# EAGLE board pot-boardDesp-snak2 (EAGLE 6.6.0)
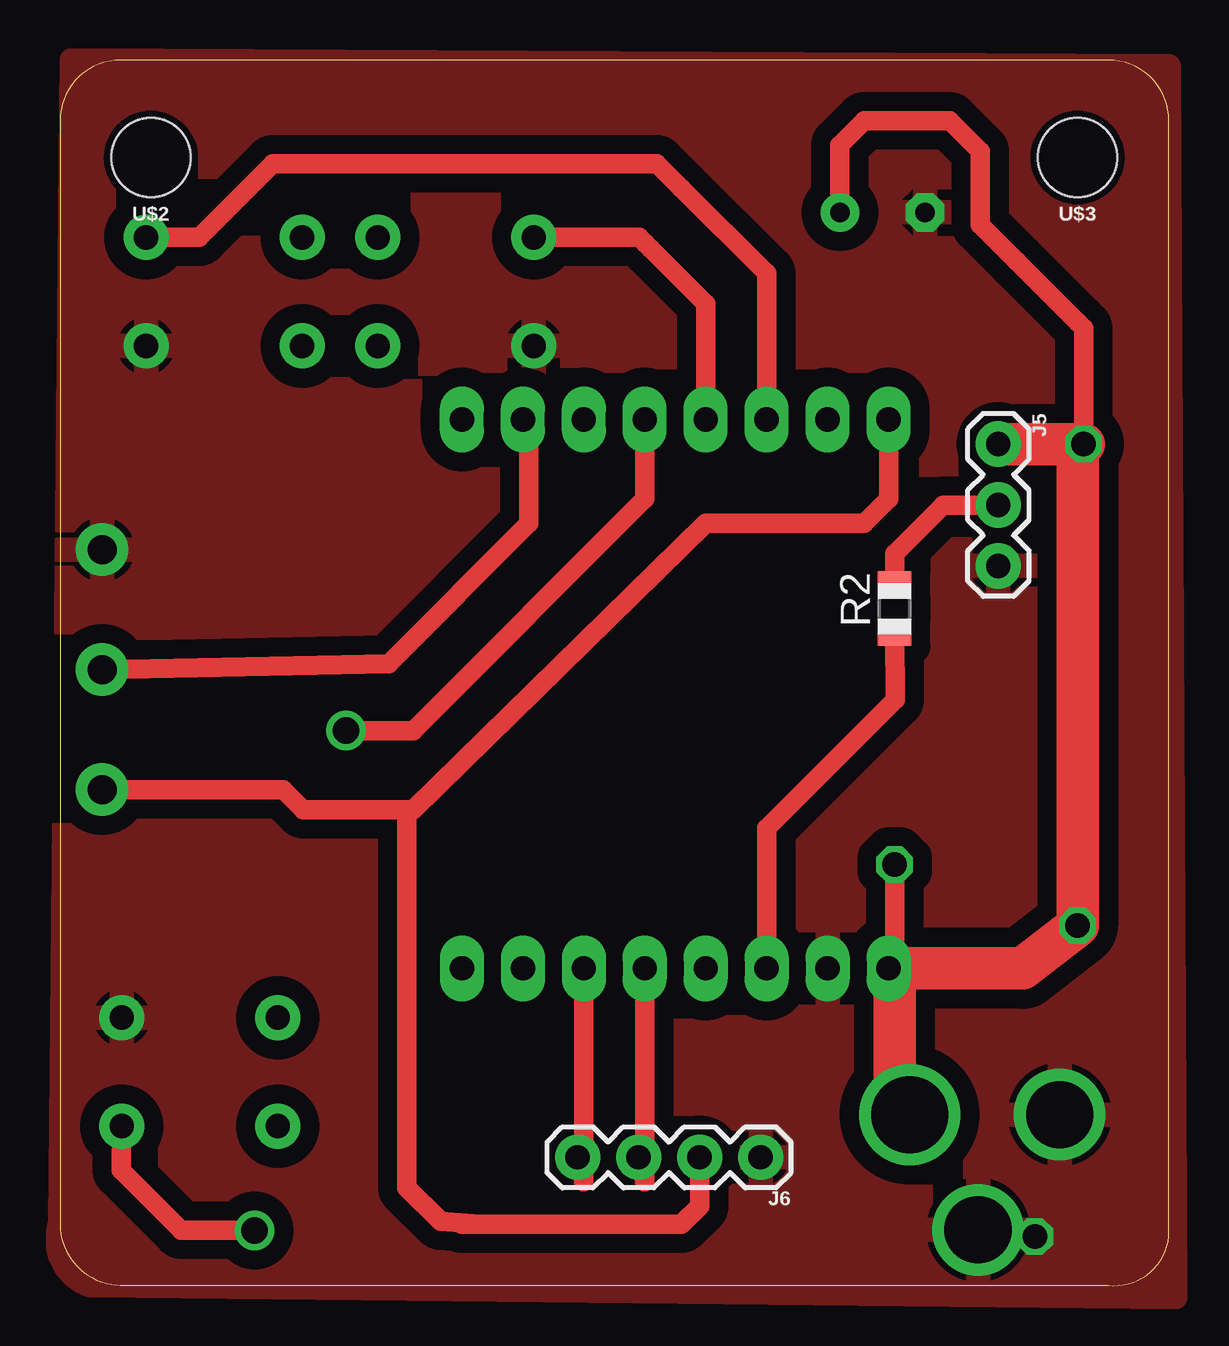
[diagram p0: board, top side]
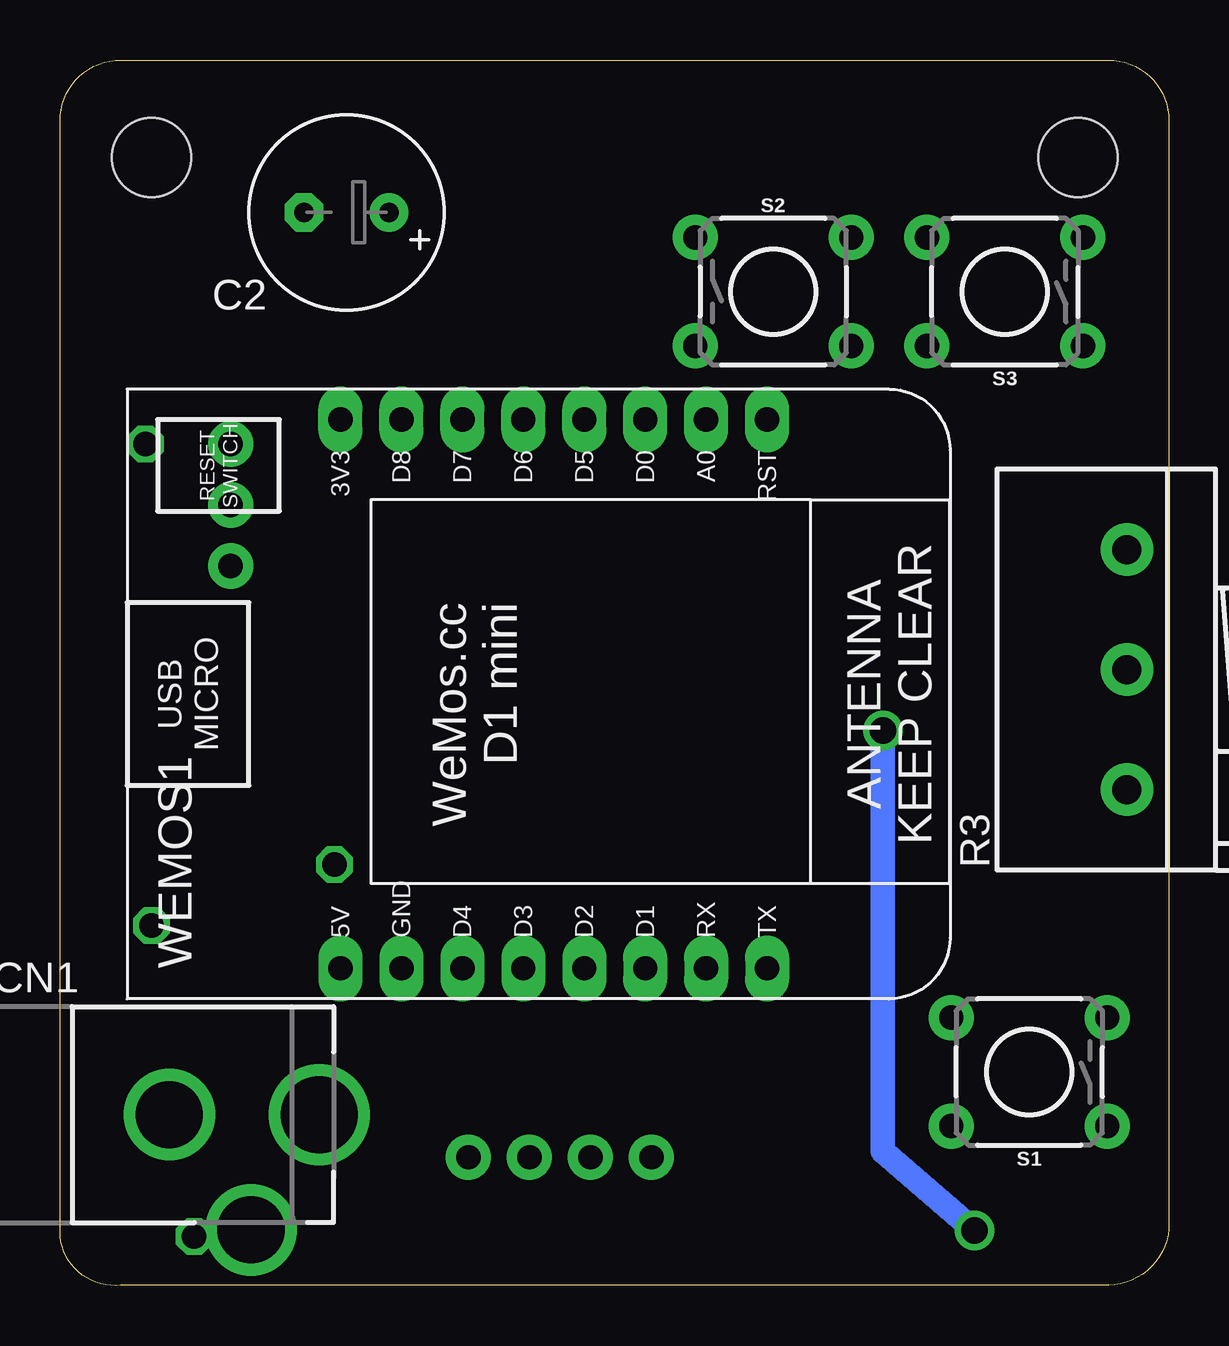
[diagram p1: board, bottom side, seen from below]

Size 46.21 x 51.07 mm. Coordinates in mm from the lower left corner, seen from the top.
Outline: 46.21,2.05 46.21,48.53 arc90 43.67,51.07 2.54,51.07 arc90 0,48.53 0,2.63 arc90 2.52,0.01 43.67,0.01 arc90 46.21,2.05
Copper layers (1*16): Top 0.035mm / dielectric 1.5mm / Bottom 0.035mm
Design rules "OthermillDRC_1_32_v2": minimum track width 8mil, minimum drill 0.8mm, track to track 0.794003125mm, track to pad 0.794003125mm, pad to pad 0.794003125mm, via to via 0.794003125mm, smd to smd 0mil, copper to edge 0mil, drill to drill 1mil, minimum pad ring 10mil, minimum via ring 10mil, stop-mask expansion 1mil, vias tented up to drill 30mil, thermal gap 10mil

## Footprints (pad centres in the part's own frame; a part is rotated, then mirrored left to right if it is on the bottom)
E3,5-8 = drill 0.813 pad 1.6: + -1.778,0 | drill 0.813 pad 1.6 octagon: - 1.778,0
DCJACK_2MM_PTH = drill 2.8: GND 0,7.35; GNDBREAK 4.8,10.75 | drill 3.2: PWR 0,13.6
1X03 = drill 1.016 pad 1.88: 1 0,0; 2 2.54,0; 3 5.08,0
1X04 = drill 1.016 pad 1.88: 1 0,0; 2 2.54,0; 3 5.08,0; 4 7.62,0
R0805 = smd 1.1 x 1.4: 1 -1,0; 2 1,0
3RP/1610N = drill 1.2 pad 2.184: 1 -5,0; 2 0,0; 3 5,0
TACTILE_SWITCH_PTH_6.0MM = drill 1.016 pad 1.88: 1 -3.251,2.261; 2 3.251,2.261; 3 -3.251,-2.261; 4 3.251,-2.261
STAND-OFF = hole 3.302: 0,0
WEMOS-D1-MINI = drill 1.016 pad 1.829 long: 3V3 -10.16,-10.16; 5V 12.7,-10.16; A0 -10.16,5.08; D0 -10.16,2.54; D1 12.7,2.54; D2 12.7,0; D3 12.7,-2.54; D4 12.7,-5.08; D5 -10.16,0; D6 -10.16,-2.54; D7 -10.16,-5.08; D8 -10.16,-7.62; GND 12.7,-7.62; RESET -10.16,7.62; RX 12.7,5.08; TX 12.7,7.62

## Placement (x,y rotation side)
C2  [E3,5-8]  34.27,44.72 180 bottom
CN1  [DCJACK_2MM_PTH]  49,7.13 270 bottom
J5  [1X03]  39.1,35.07 270 top
J6  [1X04]  29.19,5.35 180 top
R2  500  [R0805]  34.78,28.21 90 top
R3  [3RP/1610N]  1.76,25.67 90 bottom
S1  tact6mm  [TACTILE_SWITCH_PTH_6.0MM]  5.82,8.9 180 bottom
S2  tact6mm  [TACTILE_SWITCH_PTH_6.0MM]  16.49,41.42 0 bottom
S3  tact6mm  [TACTILE_SWITCH_PTH_6.0MM]  6.84,41.42 180 bottom
U$2  [STAND-OFF]  3.79,47 180 top
U$3  [STAND-OFF]  42.4,47 180 top
WEMOS1  [WEMOS-D1-MINI]  24.36,25.92 270 bottom

## Library data of the parts
C2 CN1 R2 = adafruit
J5 = SparkFun-Connectors
J6 = SparkFun-Connectors; PROD_ID: CONN-09696
R3 = pot
S1-S3 = SparkFun-Switches; PROD_ID: SWCH-08441; SF_SKU: COM-00097
U$2 U$3 = SparkFun-Hardware
WEMOS1 = esp8266modules

## Nets
+3V3: J6.2 R3.1 WEMOS1.3V3
A0: R3.2 WEMOS1.A0
BUTT1: S1.1 WEMOS1.D5
BUTT2: S2.1 WEMOS1.D6
BUTT3: S3.3 WEMOS1.D7
GND: C2.- CN1.GND CN1.GNDBREAK J5.3 J6.1 R3.3 S1.3 S2.3 S3.1 WEMOS1.GND
LED1: R2.1 WEMOS1.D4
LED1O: J5.2 R2.2
LED2: WEMOS1.D3
SCL: J6.4 WEMOS1.D1
SDA: J6.3 WEMOS1.D2
VIN: C2.+ CN1.PWR J5.1 WEMOS1.5V

## Tracks (layer width: path | path; a pad name or v marks a point on that pad's centre or on a via)
+3V3
  Top 0.813: 2.52,20.67 R3.1 3.71,20.67 8.03,20.67 9.3,20.67 10.14,19.83 11.16,19.83 14.46,19.83 | J6.2 26.65,3.32 25.89,2.55 17.51,2.55 | 17.51,2.55 16.74,2.55 17.51,2.55 | WEMOS1.3V3 34.52,32.78 33.51,31.76 27.92,31.76 26.9,31.76 14.71,19.83 14.46,19.83 | 17.51,2.55 15.86,2.68 14.46,4.08 14.46,14.24 14.46,19.83
A0
  Top 0.813: R3.2 13.7,25.92 19.54,31.76 19.54,35.83 WEMOS1.A0
BUTT1  (via drill 1.1)
  Top 0.813: v11.92,23.13 14.71,23.13 24.36,32.78 WEMOS1.D5 | S1.1 2.54,4.81 5.06,2.3 v8.11,2.3
  Bottom 1.016: v8.11,2.3 11.92,5.6 v11.92,23.13
BUTT2
  Top 0.813: WEMOS1.D6 26.9,40.91 24.62,43.19 24.39,43.42 24.14,43.68 S2.1
BUTT3
  Top 0.813: WEMOS1.D7 29.44,42.18 25.89,45.73 24.87,46.75 23.6,46.75 9.2,46.75 | 9.2,46.75 8.87,46.75 | 8.87,46.75 9.2,46.75 | S3.3 5.04,43.68 5.8,43.68 8.87,46.75
GND  (via drill 1.02)
  other vias: 40.62,2.05
  pour Top: 0.49,51.07 0.01,2.58 arc91 1.28,0.01 46.46,-0.49 46.21,50.81
LED1
  Top 0.813: WEMOS1.D4 29.44,16.27 29.44,19.06 34.79,24.41 R2.1
LED1O
  Top 0.813: J5.2 36.81,32.53 34.78,30.49 R2.2
SCL
  Top 0.813: WEMOS1.D1 21.82,4.33 J6.4
SDA
  Top 0.813: WEMOS1.D2 24.36,4.33 J6.3
VIN  (via drill 1.02)
  Top 0.813: 34.78,13.22 v34.78,17.54 34.78,13.22 | 34.78,13.22 34.78,12.97 | 34.78,12.97 34.78,7.38 | 34.78,7.38 CN1.PWR | CN1.PWR 35.54,7.13 | WEMOS1.5V 34.78,12.97 | 34.78,12.97 34.78,7.38 | 34.78,7.38 CN1.PWR | CN1.PWR 35.54,7.13 | 35.54,7.13 CN1.PWR | CN1.PWR 34.78,7.38 | 34.78,7.38 34.78,12.97 | 34.78,12.97 34.78,13.22 | C2.+ 32.49,47.51 33.51,48.53 37.06,48.53 38.33,47.26 38.33,44.21 39.86,42.69 42.4,40.15 42.65,39.89 v42.65,35.07
  Top 1.016: 42.4,35.07 v42.65,35.07
  Top 1.27: v42.4,15 40.11,13.22
  Top 1.778: 34.78,7.38 34.78,13.22 40.11,13.22 v42.4,15 42.4,35.07 | CN1.PWR 34.78,7.38 | 35.54,7.13 34.78,7.38 | J5.1 42.4,35.07 | 42.4,35.07 v42.65,35.07 | 42.4,35.07 v42.65,35.07 | v42.65,35.07 42.4,35.07

## Text on the board
tPlace: ILOVELAMP | pot-boardDesp-snak2